# Altium PCB ALL - Copy.PcbDoc (part 2 of 2)
Units mm, origin at the board's own origin, x right, y up, seen from the top; angles counter-clockwise.
Board outline 128.4 x 123.32 mm, 2 copper layers (Top Layer, Bottom Layer); 140 components, 118 nets, 647 pads, 124 vias.
Unrouted connection lines stored in the file: 23.
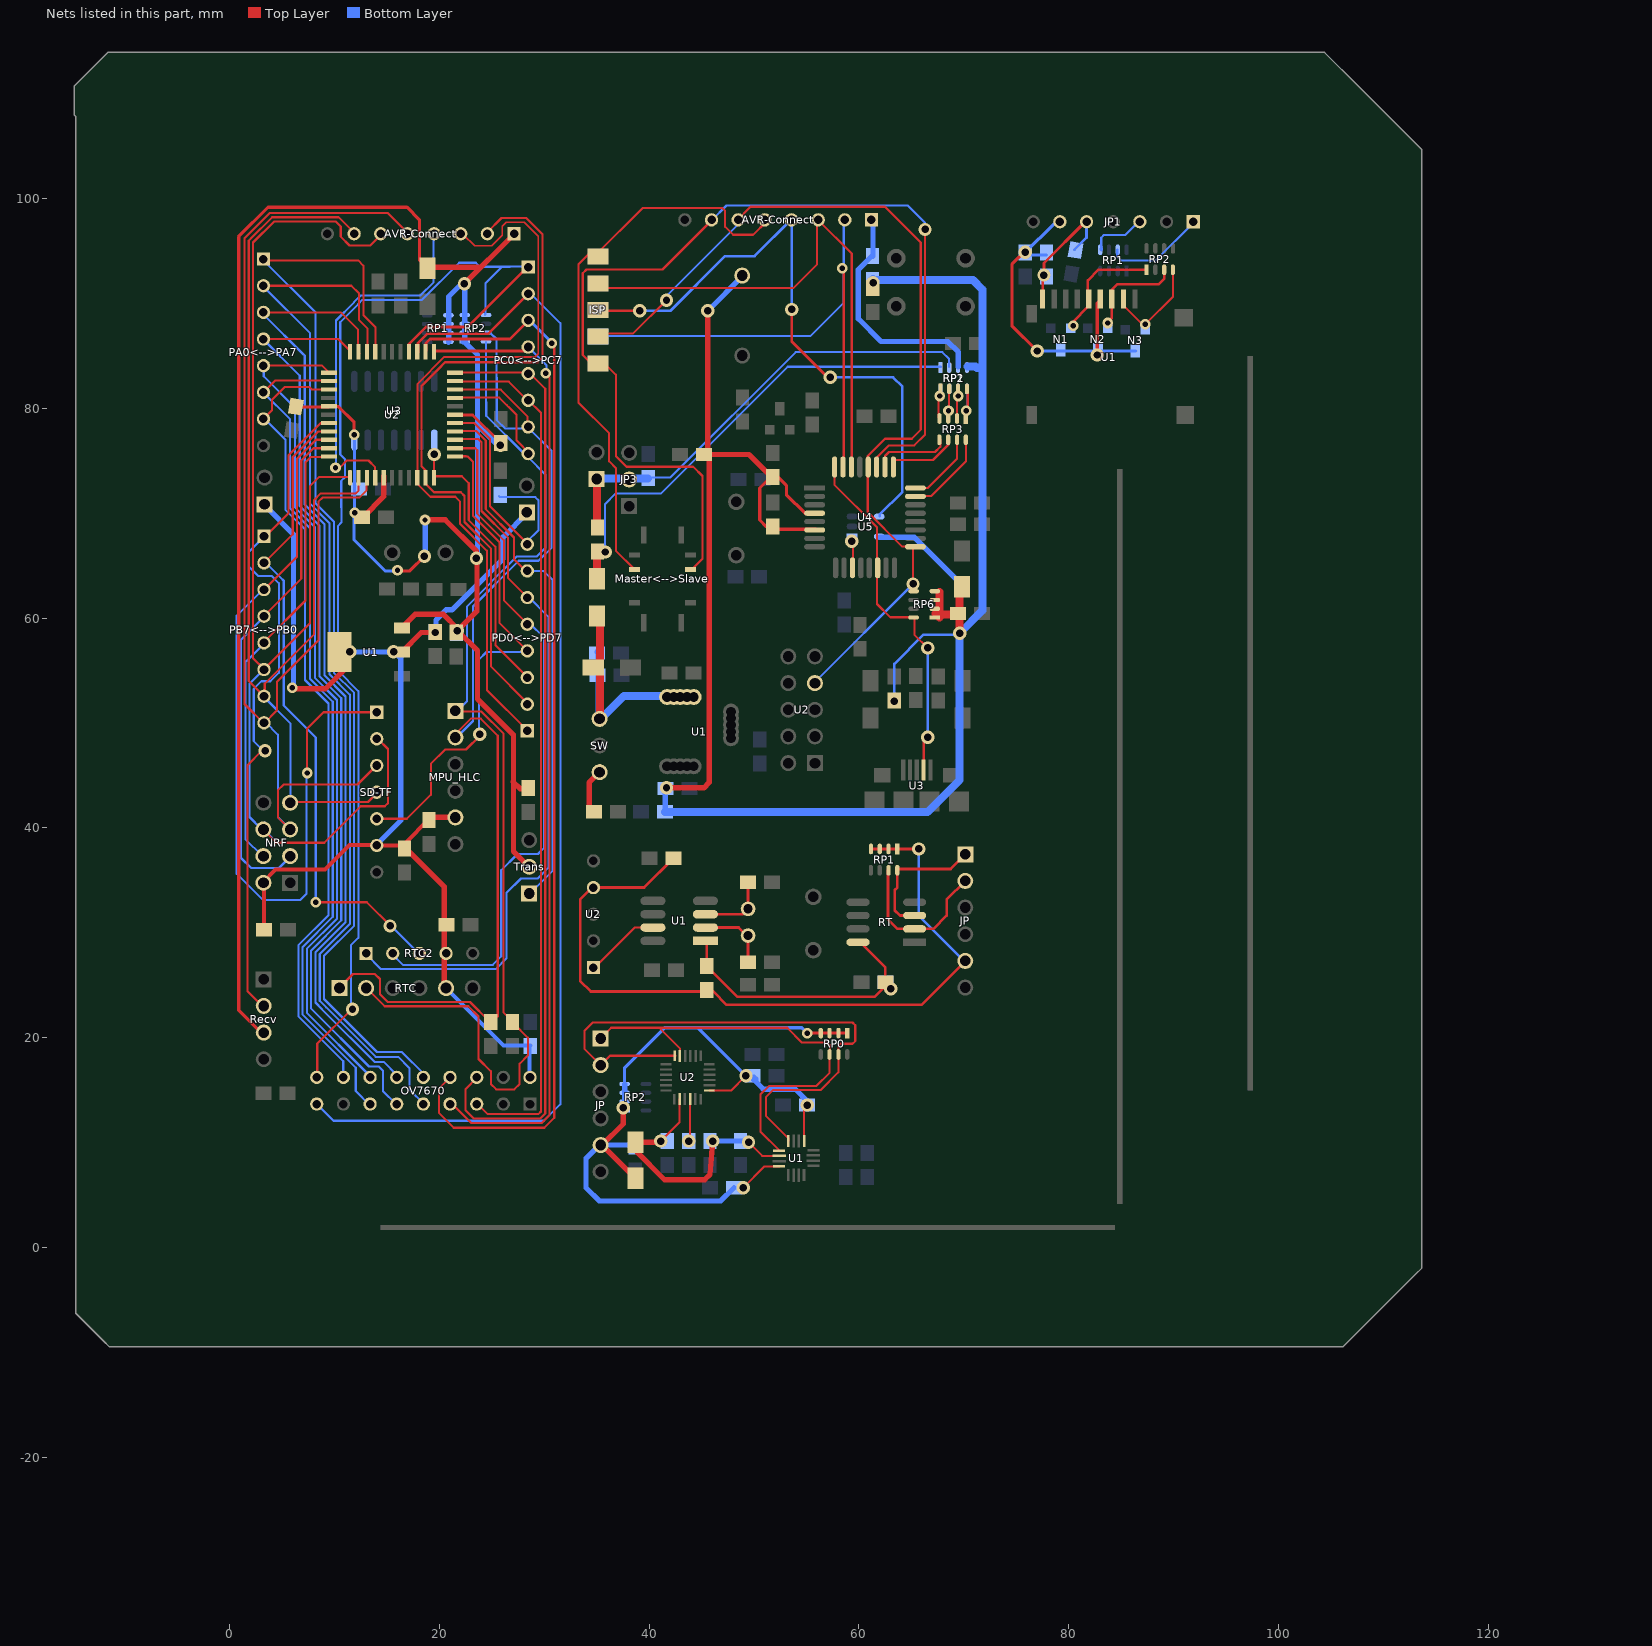
[diagram p2: the nets of this part, all layers, seen from the top]

## Via types
v1: diameter 1.27, hole 0.711, Top Layer to Bottom Layer, 84 vias
v2: diameter 1.016, hole 0.508, Top Layer to Bottom Layer, 35 vias
v3: diameter 1.143, hole 1.143, Top Layer to Bottom Layer, 2 vias
v4: diameter 1.016, hole 1.016, Top Layer to Bottom Layer, 2 vias
v5: diameter 1.016, hole 0.508, Top Layer to Bottom Layer, tented top, 1 vias

## Nets (pads, with @x,y where several pads share a name; then routed paths per layer and width w, separated by ;. In a path a pad name is that pad's centre, name@x,y a point inside that pad or via, vN(x,y) a via of type N, cw(c..) or ccw(c..) an arc to the next point about the centre after c; other vN are vias at no path point) (continued)
PA1: OV7670.16 PA0<-->PA7.7 U2.36 | length 76.3
  Top Layer w0.203: PA0<-->PA7.7@3.251,78.994 4.064,79.807 4.064,80.797 5.283,82.017 7.62,82.017 7.849,81.788 U2.36@9.474,81.788
  Bottom Layer w0.203: PA0<-->PA7.7@3.353,78.943 3.404,78.943 5.334,77.013 5.334,70.326 7.214,68.446 7.214,54.092 9.449,51.857 9.449,31.693 6.579,28.823 6.579,22.041 10.855,17.764 10.855,16.291 OV7670.16@10.846,16.281
PA2: OV7670.13 PA0<-->PA7.6 U2.35 | length 81.1
  Top Layer w0.203: PA0<-->PA7.6@3.251,81.509 4.394,82.652 U2.35@9.347,82.652
  Bottom Layer w0.203: PA0<-->PA7.6@3.302,81.509 3.302,81.432 5.791,78.943 5.791,70.444 7.696,68.539 7.696,54.184 9.855,52.025 9.855,31.525 6.985,28.655 6.985,22.209 12.049,17.145 12.049,14.926 OV7670.13@13.437,13.538
PA3: OV7670.14 PA0<-->PA7.5 U2.34 | length 80.7
  Top Layer w0.203: PA0<-->PA7.5@3.378,84.049 8.839,84.049 U2.34@9.601,83.287
  Bottom Layer w0.203: PA0<-->PA7.5@3.277,84.049 3.277,83.033 6.248,80.061 6.248,70.561 8.179,68.631 8.179,54.276 10.262,52.194 10.262,31.357 7.391,28.486 7.391,22.377 OV7670.14@13.36,16.408
PA4: OV7670.11 PA0<-->PA7.4 U2.33 | length 89.7
  Top Layer w0.203: PA0<-->PA7.4@3.378,86.589 10.363,86.589 U2.33@11.506,85.446
  Bottom Layer w0.203: PA0<-->PA7.4@3.2,86.589 6.706,83.083 6.706,70.679 7.539,69.845 ; 7.544,69.85 8.585,68.809 8.585,54.445 10.668,52.362 10.668,45.796 ; 10.668,45.771 10.668,31.188 7.798,28.318 7.798,22.784 13.31,17.272 14.249,17.272 14.63,16.891 14.63,14.935 OV7670.11@15.9,13.665
PA5: OV7670.12 PA0<-->PA7.3 U2.32 | length 92.9
  Top Layer w0.203: PA0<-->PA7.3@3.251,89.129 10.617,89.129 12.268,87.478 12.268,85.319 U2.32@12.395,85.192
  Bottom Layer w0.203: PA0<-->PA7.3@3.327,89.154 3.327,88.849 7.061,85.115 7.087,85.115 7.188,85.014 7.188,70.815 9.068,68.936 9.068,54.537 11.074,52.53 11.074,31.02 8.204,28.15 8.204,23.362 8.814,22.752 8.814,22.733 11.532,20.015 11.541,20.015 13.86,17.696 ; 13.868,17.704 14.707,17.704 OV7670.12@15.977,16.434
PA6: OV7670.9 PA0<-->PA7.2 U2.31 | length 103
  Top Layer w0.203: PA0<-->PA7.2@3.378,91.669 11.633,91.669 12.37,90.932 12.37,88.392 13.157,87.605 U2.31@13.157,85.573
  Bottom Layer w0.203: PA0<-->PA7.2@3.251,91.694 3.251,91.567 7.696,87.122 7.696,70.882 9.55,69.028 9.55,54.629 11.481,52.699 11.481,30.852 8.611,27.981 8.611,23.53 9.22,22.92 9.22,22.911 13.945,18.186 16.088,18.186 17.154,17.12 17.154,15.078 OV7670.9@18.567,13.665
PA7: OV7670.10 PA0<-->PA7.1 U2.30 | length 106.1
  Top Layer w0.203: PA0<-->PA7.1@3.251,94.209 3.378,94.082 12.268,94.082 12.776,93.574 12.776,88.875 13.919,87.732 U2.30@13.919,85.446
  Bottom Layer w0.203: PA0<-->PA7.1@3.277,94.183 3.277,94.056 8.204,89.129 8.204,70.949 9.957,69.196 9.957,54.797 11.887,52.867 11.887,46.558 ; 9.55,69.602 9.55,69.621 ; 11.887,46.542 11.887,30.683 9.017,27.813 9.017,23.698 14.072,18.644 16.434,18.644 OV7670.10@18.517,16.561 ; 12.573,20.142 12.573,20.168
PB0: PB7<-->PB0.1 Recv.2 U2.40 | length 64.9
  Top Layer w0.203: Recv.2@2.997,23.063 Recv.2@3.175,23.063 ; Recv.2@3.175,23.139 Recv.2@3.2,23.139 ; Recv.2@3.277,22.885 1.727,24.435 1.727,45.974 3.15,47.396 v1@3.378,47.396 ; PB7<-->PB0.1@3.429,67.767 5.639,69.977 5.639,75.514 8.712,78.588 U2.40@9.474,78.588
  Bottom Layer w0.203: v1@3.327,47.269 2.324,48.273 2.324,53.251 3.048,53.975 3.912,53.975 4.724,54.788 4.724,63.322 4.039,64.008 2.769,64.008 1.88,64.897 1.88,66.319 PB7<-->PB0.1@3.327,67.767
  other v1: 3.404,47.346
PB1: PB7<-->PB0.2 RTC2.3 U2.41 | length 62.1
  Top Layer w0.203: PB7<-->PB0.2@3.327,65.253 6.045,67.97 6.045,75.346 8.474,77.775 U2.41@9.423,77.775 ; v2(8.23,32.918) 13.106,32.918 v1@15.469,30.556 ; U2.41@9.423,77.826 U2.41@9.474,77.826
  Bottom Layer w0.203: PB7<-->PB0.2@3.302,65.227 3.505,65.227 5.08,63.652 5.105,63.652 5.182,63.576 5.182,51.664 8.23,48.616 v2@8.23,32.969 ; v1@15.367,30.709 RTC2.3@18.072,28.003
  other v1: 15.316,30.658
PB2: PB7<-->PB0.3 SD-TF.1 U2.42 | length 76.9
  Top Layer w0.203: PB7<-->PB0.3@3.302,62.687 6.452,65.837 6.452,75.178 8.261,76.987 U2.42@9.449,76.987 ; v2(7.417,45.237) 7.417,49.479 8.966,51.029 14.072,51.029 SD-TF.1@14.148,51.105 ; U2.42@9.449,76.937 U2.42@9.474,76.937
  Bottom Layer w0.203: 0.813,60.325 0.813,60.35 ; PB7<-->PB0.3@3.277,62.789 0.711,60.223 0.711,35.636 3.226,33.122 6.731,33.122 7.366,33.757 v2@7.366,45.263
PB3: NRF.3 PB7<-->PB0.4 U2.43 | length 57.5
  Top Layer w0.203: PB7<-->PB0.4@3.327,60.223 6.858,63.754 6.858,75.009 8.023,76.175 U2.43@9.474,76.175
  Bottom Layer w0.203: 1.118,54.093 1.118,55.972 ; 1.219,58.039 PB7<-->PB0.4@3.404,60.223 ; 2.642,36.195 4.699,36.195 NRF.3@5.817,37.313 ; PB7<-->PB0.4@3.277,60.173 3.277,60.122 1.194,58.039 1.194,58.014 1.118,57.937 1.118,37.135 2.057,36.195 4.801,36.195 5.842,37.236 NRF.3@5.842,37.262
PB4: NRF.4 PB7<-->PB0.5 U2.44 | length 43
  Top Layer w0.203: PB7<-->PB0.5@3.327,57.734 7.264,61.671 7.264,74.841 7.785,75.362 U2.44@9.5,75.362 ; U2.44@9.474,75.362 U2.44@9.474,75.413
  Bottom Layer w0.178: 1.524,54.762 1.524,38.938 NRF.4@3.124,37.338
  Bottom Layer w0.203: 1.524,54.762 1.524,55.804 1.676,55.956 1.702,55.956 3.226,57.48 PB7<-->PB0.5@3.226,57.582 ; PB7<-->PB0.5@3.264,57.544 PB7<-->PB0.5@3.327,57.607
PB5: AVR-Connect.6@14.427,96.622 NRF.6 PB7<-->PB0.6 SD-TF.2 U2.1@11.506,73.381 | length 118.3
  Top Layer w0.203: NRF.6@3.277,39.776 4.47,38.583 9.042,38.583 12.522,42.062 14.808,42.062 15.113,42.367 15.113,47.523 SD-TF.2@14.148,48.489 ; PB7<-->PB0.6@3.302,55.143 2.261,56.185 2.261,95.783 4.267,97.79 10.135,97.79 10.617,97.307 10.617,96.342 11.455,95.504 13.437,95.504 14.402,96.469 AVR-Connect.6@14.402,96.647 ; PB7<-->PB0.6@3.353,55.169 7.671,59.487 7.671,72.568 8.56,73.457 U2.1@11.506,73.457
  Bottom Layer w0.203: NRF.6@3.023,39.929 1.918,41.034 1.918,53.734 3.226,55.042 PB7<-->PB0.6@3.226,55.093 ; NRF.6@3.302,39.827 4.394,38.735 ; NRF.6@3.378,39.827 NRF.6@3.378,40.488
PB6: AVR-Connect.7@11.887,96.622 NRF.7 PB7<-->PB0.7 SD-TF.4 U2.2@12.306,73.381 | length 102.2
  Top Layer w0.203: 2.007,96.104 1.854,95.952 1.854,54 PB7<-->PB0.7@3.302,52.553 ; 2.007,96.114 4.089,98.196 10.414,98.196 11.938,96.672 AVR-Connect.7@11.938,96.647 ; PB7<-->PB0.7@3.302,52.527 3.378,52.603 3.378,53.746 8.077,58.445 8.077,71.247 8.712,71.882 12.065,71.882 12.319,72.136 U2.2@12.319,73.457 ; NRF.7@5.842,42.469 13.208,42.469 SD-TF.4@14.122,43.383
  Bottom Layer w0.203: PB7<-->PB0.7@3.2,52.578 5.842,49.936 NRF.7@5.842,42.469
PB7: AVR-Connect.5@16.967,96.622 NRF.5 PB7<-->PB0.8 SD-TF.3 U2.3@13.106,73.381 | length 120.4
  Top Layer w0.203: PB7<-->PB0.8@3.277,49.987 1.448,51.816 1.448,96.19 3.861,98.603 15.088,98.603 17.018,96.672 AVR-Connect.5@17.018,96.647 ; PB7<-->PB0.8@3.327,49.987 4.547,51.206 4.547,53.924 8.484,57.861 8.484,71.079 8.881,71.476 12.395,71.476 13.081,72.161 U2.3@13.081,73.431 ; NRF.5@5.74,39.903 4.623,41.021 4.623,43.586 5.182,44.145 12.217,44.145 13.97,45.898 SD-TF.3@14.122,45.898 ; U2.3@13.106,73.381 U2.3@13.106,73.482
  Bottom Layer w0.203: PB7<-->PB0.8@3.454,50.063 4.623,48.895 4.623,41.046 5.74,39.929 NRF.5@5.74,39.827 ; NRF.5@5.867,39.853 NRF.5@5.893,39.827 ; SD-TF.3@13.487,45.898 SD-TF.3@14.072,45.898
PC0: MPU_HLC.1 PC0<-->PC7.8 R5.2@26.975,21.488 RP2.8@24.46,86.36 RTC.2 U2.19@21.506,80.981 | length 114.7
  Top Layer w0.203: RTC.2@13.106,24.714 14.808,23.012 22.768,23.012 23.749,22.031 23.749,17.983 24.917,16.815 24.917,15.596 25.425,15.088 27.153,15.088 27.661,15.596 27.661,17.526 28.448,18.313 28.448,20.015 R5.2@27.102,21.361 ; U2.19@21.412,81.001 25.73,81.001 27.381,79.35 27.381,76.911 PC0<-->PC7.8@28.626,75.667 ; MPU_HLC.1@21.717,51.003 21.793,51.079 24.028,51.079 26.137,48.971 26.137,22.403 R5.2@27.076,21.463 ; 26.416,80.289 26.441,80.289
  Bottom Layer w0.203: RTC.2@13.081,24.613 RTC.2@13.081,24.663 ; MPU_HLC.1@21.539,51.206 MPU_HLC.1@21.539,51.41 ; MPU_HLC.1@21.666,51.105 22.657,52.095 22.657,61.112 24.968,63.424 24.968,63.449 27.381,65.862 29.286,65.862 30.124,66.7 30.124,73.66 28.423,75.362 PC0<-->PC7.8@28.423,75.413 ; 24.46,80.594 RP2.8@24.46,86.284 ; 24.486,80.594 24.486,79.273 PC0<-->PC7.8@28.169,75.59
PC1: MPU_HLC.2 PC0<-->PC7.7 R4.1@24.917,21.514 RP2.7@24.46,87.198 RTC.1 U2.20@21.506,81.781 | length 107.6
  Top Layer w0.203: RTC.1@10.439,24.74 11.786,26.086 13.868,26.086 14.351,25.603 14.351,24.155 15.088,23.419 22.936,23.419 24.765,21.59 R4.1@24.917,21.59 ; U2.20@21.412,81.763 25.857,81.763 28.397,79.223 28.397,78.334 PC0<-->PC7.7@28.524,78.207 ; MPU_HLC.2@21.438,48.844 23.012,50.419 23.952,50.419 25.578,48.793 25.578,22.047 R4.1@25.07,21.539
  Bottom Layer w0.203: MPU_HLC.2@21.514,48.666 MPU_HLC.2@21.539,48.666 ; MPU_HLC.2@21.539,48.616 21.641,48.616 23.216,50.19 23.216,61.096 27.575,65.456 29.464,65.456 30.709,66.7 30.709,75.921 PC0<-->PC7.7@28.397,78.232 ; RP2.7@24.46,87.198 24.841,87.198 25.451,86.589 25.451,82.931 ; 25.476,82.931 25.476,78.858 26.264,78.07 28.305,78.07 PC0<-->PC7.7@28.423,77.953
PC2: OV7670.5 PC0<-->PC7.6 U2.21@21.506,82.581 | length 82.5
  Top Layer w0.203: U2.21@21.539,82.525 26.619,82.525 PC0<-->PC7.6@28.397,80.747 ; OV7670.5@23.597,13.665 23.673,13.665 24.613,12.725 29.439,12.725 29.693,12.979 29.693,79.553 PC0<-->PC7.6@28.448,80.797
PC3: OV7670.6 PC0<-->PC7.5 U2.22@21.506,83.381 | length 89.9
  Top Layer w0.203: U2.22@21.539,83.414 PC0<-->PC7.5@28.524,83.414 ; OV7670.6@23.571,16.231 23.571,16.18 22.504,15.113 22.504,13.081 23.266,12.319 29.413,12.319 ; PC0<-->PC7.5@28.575,83.388 30.099,81.864 30.099,12.792 29.616,12.31 29.413,12.31
PC4: OV7670.7 PC0<-->PC7.4 U2.23@19.506,85.381 | length 93.3
  Top Layer w0.203: OV7670.7@21.082,13.64 21.285,13.64 23.038,11.887 28.499,11.887 29.769,11.887 30.505,12.624 30.505,82.931 v2@30.15,83.287
  Top Layer w0.254: U2.23@19.634,85.446 28.016,85.446 PC0<-->PC7.4@28.397,85.827
  Bottom Layer w0.203: PC0<-->PC7.4@28.499,85.827 30.226,84.099 v2@30.226,83.414
  other v2: 30.15,83.337
PC5: OV7670.8 PC0<-->PC7.3 U2.24@18.706,85.381 | length 104.5
  Top Layer w0.203: OV7670.8@21.006,16.18 19.964,15.138 19.964,12.852 21.387,11.43 30.023,11.43 30.963,12.37 30.963,85.954 v2@30.658,86.258 ; OV7670.8@21.057,16.078 OV7670.8@21.057,16.256
  Top Layer w0.254: U2.24@18.745,85.446 18.745,86.208 19.126,86.589 26.746,86.589 PC0<-->PC7.3@28.524,88.367
  Bottom Layer w0.254: PC0<-->PC7.3@28.524,88.367 28.626,88.367 v2@30.759,86.233
  other v2: 30.709,86.182
PC6: OV7670.17 PC0<-->PC7.2 U2.25 | length 116.6
  Top Layer w0.254: OV7670.17@8.382,13.513 OV7670.17@8.382,13.64 ; U2.25@17.983,85.319 17.983,86.208 18.872,87.097 24.714,87.097 PC0<-->PC7.2@28.524,90.907
  Bottom Layer w0.203: OV7670.17@8.407,13.614 9.931,12.09 29.972,12.09 31.547,13.665 31.547,88.087 PC0<-->PC7.2@28.727,90.907
  Bottom Layer w0.254: PC0<-->PC7.2@28.473,90.907 PC0<-->PC7.2@28.727,90.907
PC7: OV7670.18 PC0<-->PC7.1 RP2.5@24.46,88.875 U2.26 | length 116
  Top Layer w0.203: OV7670.18@8.382,16.129 8.382,19.456 v1@11.659,22.733
  Top Layer w0.254: U2.26@17.094,85.446 17.094,86.081 18.745,87.732 22.682,87.732 PC0<-->PC7.1@28.397,93.447
  Bottom Layer w0.203: 10.668,70.561 10.668,73.066 11.024,73.422 11.024,75.133 10.566,75.59 10.566,88.189 12.268,89.891 12.268,89.916 12.675,90.322 18.364,90.322 21.895,93.853 23.495,93.853 23.876,93.472 26.746,93.472 ; 10.693,70.561 10.693,69.113 10.363,68.783 10.363,54.966 12.294,53.035 12.294,29.54 11.608,28.854 v1@11.608,22.479 ; RP2.5@24.359,88.9 RP2.5@24.359,89.002 ; RP2.5@24.409,88.925 24.409,91.897 25.984,93.472 ; 26.746,93.497 28.448,93.497 PC0<-->PC7.1@28.473,93.472
  other v1: 11.735,22.708
PD0: AVR-Connect.3@22.047,96.622 PD0<-->PD7.1 U2.9@17.906,73.381 | length 73.6
  Top Layer w0.178: U2.9@17.882,73.431 17.932,73.482 17.932,82.321 20.498,84.887 29.159,84.887 29.439,85.166 29.439,96.368 28.092,97.714 26.391,97.714 26.01,97.333 26.01,96.469 25.019,95.479 23.368,95.479 22.301,96.545 AVR-Connect.3@22.022,96.545 ; 27.963,84.887 28.931,84.887
  Top Layer w0.203: U2.9@17.907,73.482 17.907,72.796 19.152,71.552 21.539,71.552 21.996,71.095 21.996,68.961 24.536,66.421 24.536,53.137 PD0<-->PD7.1@28.423,49.251 ; AVR-Connect.3@22.098,96.672 AVR-Connect.3@22.098,96.723
PD1: AVR-Connect.2@24.587,96.622 PD0<-->PD7.2 U2.10@18.706,73.381 | length 71.2
  Top Layer w0.203: 18.364,82.144 20.218,83.998 ; U2.10@18.694,73.355 18.694,74.067 18.326,74.435 18.326,82.158 20.547,84.379 29.362,84.379 29.845,84.861 29.845,96.571 29.769,96.647 28.296,98.12 25.933,98.12 24.587,96.774 AVR-Connect.2@24.587,96.672 ; U2.10@18.745,73.381 18.745,72.746 19.507,71.984 22.047,71.984 22.403,71.628 22.403,69.155 24.943,66.615 24.943,55.372 PD0<-->PD7.2@28.499,51.816 ; AVR-Connect.2@24.638,96.672 AVR-Connect.2@24.663,96.672 ; 27.838,84.379 29.393,84.379
PD2: PD0<-->PD7.3 U2.11@19.506,73.381 U3.8@19.533,76.962 | length 26.6
  Top Layer w0.203: U2.11@19.507,73.508 22.149,73.508 22.809,72.847 22.809,69.333 25.349,66.793 25.349,57.429 28.448,54.331 PD0<-->PD7.3@28.473,54.331 ; v1@19.507,75.667 19.507,73.635 U2.11@19.558,73.584
  other v1: 19.533,75.59
PD3: PD0<-->PD7.4 SD-TF.5 U2.12@21.506,75.381 | length 50.7
  Top Layer w0.203: SD-TF.5@14.046,40.818 14.097,40.869 16.916,40.869 19.202,43.155 19.202,46.101 20.574,47.473 22.555,47.473 v1@23.927,48.844 ; U2.12@21.412,75.413 22.555,75.413 ; U2.12@21.488,75.387 22.733,75.387 23.216,74.905 23.216,69.739 25.756,67.199 25.756,59.512 PD0<-->PD7.4@28.423,56.845
  Bottom Layer w0.203: v1@23.774,48.971 23.774,56.032 24.511,56.769 28.245,56.769 PD0<-->PD7.4@28.423,56.947 ; PD0<-->PD7.4@28.296,56.845 PD0<-->PD7.4@28.448,56.845 ; PD0<-->PD7.4@28.372,56.769 PD0<-->PD7.4@28.524,56.921
  other v1: 23.851,48.92
PD4: PD0<-->PD7.5 RTC2.2 U2.13@21.506,76.181 | length 67.4
  Top Layer w0.203: RTC2.2@15.621,28.042 RTC2.2@15.723,28.042 ; U2.13@21.539,76.175 23.444,76.175 23.622,75.997 23.622,69.952 26.162,67.412 26.162,61.697 28.448,59.411 PD0<-->PD7.5@28.473,59.436 ; PD0<-->PD7.5@28.486,59.449 PD0<-->PD7.5@28.524,59.411
  Bottom Layer w0.203: RTC2.2@15.494,27.991 16.535,26.949 25.095,26.949 25.908,27.762 25.908,35.966 27.407,37.465 27.534,37.465 27.584,37.516 29.413,37.516 29.997,38.1 29.997,58.115 28.651,59.461 PD0<-->PD7.5@28.448,59.461
PD5: PD0<-->PD7.6 RTC2.1 U2.14@21.506,76.981 | length 71.7
  Top Layer w0.203: U2.14@21.412,77.064 23.708,77.064 24.028,76.743 24.028,70.206 26.568,67.666 26.568,63.805 PD0<-->PD7.6@28.448,61.925
  Bottom Layer w0.203: RTC2.1@13.03,27.965 14.453,26.543 25.375,26.543 26.416,27.584 26.416,33.807 27.788,35.179 29.388,35.179 30.404,36.195 30.404,60.122 28.524,62.001 PD0<-->PD7.6@28.423,62.001
PD6: PD0<-->PD7.7 Trans.1 U2.15@21.506,77.781 | length 51.2
  Top Layer w0.203: U2.15@21.412,77.826 23.52,77.826 24.435,76.911 24.435,70.374 27.127,67.682 27.127,65.608 PD0<-->PD7.7@28.346,64.389 ; Trans.1@28.6,33.807 Trans.1@28.651,33.807
  Bottom Layer w0.203: PD0<-->PD7.7@28.423,64.465 29.972,64.465 30.81,63.627 30.81,35.916 Trans.1@28.575,33.68
PD7: PD0<-->PD7.8 R6.1@25.806,71.73 U2.16@21.506,78.581 | length 24.1
  Top Layer w0.203: U2.16@21.412,78.588 23.342,78.588 24.841,77.088 24.841,70.653 28.397,67.097 PD0<-->PD7.8@28.397,67.056
  Bottom Layer w0.203: R6.1@25.679,71.603 25.756,71.526 29.159,71.526 29.464,71.222 29.464,68.377 28.346,67.259 PD0<-->PD7.8@28.346,67.056
PUSH: C2.1@80.635,95.056 JP1.5 R1.2@77.876,92.558 U1.9@77.495,90.399 | length 12
  Top Layer w0.254: U1.9@77.495,90.399 v1@77.495,92.558 ; v1@77.622,92.812 77.622,93.828 JP1.5@81.559,97.765
  Bottom Layer w0.254: C2.1@80.543,95.098 81.686,96.241 JP1.5@81.686,97.892
  other v1: 77.622,92.685
REGOUT: C13.1@43.764,10.16 U2.10@43.908,14.148 | length 4
  Top Layer w0.203: v1(43.764,10.16) 43.908,10.304 U2.10@43.908,14.148
RESET: U4.11 U5.1 | length 2.2
  Top Layer w0.203: U4.11@59.436,64.897 v1@59.436,67.056
  other v1: 59.309,67.31
RST: AVR-Connect.4@19.507,96.622 U2.4@13.906,73.381 | length 34.4
  Top Layer w0.203: v2@10.465,74.27 11.201,75.006 13.259,75.006 13.894,74.371 U2.4@13.894,73.406
  Bottom Layer w0.203: v2@10.16,74.32 10.16,88.357 11.862,90.059 11.862,90.084 12.506,90.729 18.196,90.729 19.466,91.999 19.466,96.453 AVR-Connect.4@19.583,96.571
  other v2: 10.109,74.32
RXD: AVR-Connect.2@58.649,97.942 ISP.8 U4.31 | length 51.3
  Top Layer w0.203: U4.31@58.547,74.549 v2@58.547,93.345
  Bottom Layer w0.203: ISP.8@35.433,86.868 55.372,86.868 58.547,90.043 58.547,97.917 AVR-Connect.2@58.674,98.044
  other v2: 58.42,93.345
S1: RP1.8@67.767,81.839 RP2.1@67.767,81.839 RP3.4 | length 1.9
  Top Layer w0.178: RP3.4@67.564,79.121 v2@67.564,81.026
  other v2: 67.691,81.153
S2: RP1.7@68.605,81.839 RP2.2@68.605,81.839 RP3.3 | length 4.2
  Top Layer w0.178: v2@68.58,79.756 RP2.2@68.58,81.915
  Bottom Layer w0.178: v2@68.58,79.756 RP1.7@68.58,81.788
  other v2: 68.529,79.756
S3: RP1.6@69.444,81.839 RP2.3@69.444,81.839 RP3.2 | length 1.9
  Top Layer w0.203: RP3.2@69.342,79.248 v2@69.342,81.153
  other v2: 69.444,81.153
S4: RP1.5@70.282,81.839 RP2.4@70.282,81.839 RP3.1 | length 3.9
  Top Layer w0.203: v2@70.358,80.01 RP2.4@70.358,81.915
  Bottom Layer w0.203: v2@70.358,79.883 RP1.5@70.358,81.915
  other v2: 70.231,79.756
SAMP1: RP3.8 U4.23 | length 8.3
  Top Layer w0.203: U4.23@65.405,71.628 66.901,71.628 70.203,74.93 70.203,77.061 RP3.8@70.231,77.089
SAMP2: RP3.7 U4.24 | length 7
  Top Layer w0.203: U4.24@65.378,72.39 66.548,72.39 69.342,75.184 RP3.7@69.342,77.089
SAMP3: RP3.6 U4.25 | length 6.3
  Top Layer w0.203: U4.25@63.246,75.057 67.056,75.057 68.58,76.581 RP3.6@68.58,76.962
SAMP4: RP3.5 U4.26 | length 7.3
  Top Layer w0.203: U4.26@62.484,74.549 62.484,75.438 62.865,75.819 67.243,75.819 67.751,76.327 67.751,77.029 RP3.5@67.691,77.089
SCK: AVR-Connect.6@48.489,97.942 ISP.7 JP1.3 RP1.5@82.982,95.098 RP6.5 U1.7@40.364,30.505 U2.1@34.696,26.695 U2.7@55.804,53.797 U4.17 U4.28 | length 102.6
  Top Layer w0.203: U2.1@34.696,26.568 38.633,30.505 U1.7@40.411,30.505 ; ISP.7@35.306,87.122 38.481,87.122 v1(41.656,90.297) ; v1@41.831,90.418 v1@41.955,90.416 ; AVR-Connect.6@48.387,97.917 49.657,99.187 62.484,99.187 65.888,95.783 65.888,77.953 65.024,77.089 62.484,77.089 60.833,75.438 60.833,70.104 64.135,66.802 65.151,66.802 RP6.5@65.151,62.484
  Bottom Layer w0.203: v1@41.783,90.297 41.783,90.805 AVR-Connect.6@48.641,97.663 ; U2.7@55.753,53.721 55.753,53.848 v1(65.151,63.246) ; RP1.5@83.083,95.225 83.083,96.241 83.337,96.495 85.369,96.495 JP1.3@86.512,97.638
  Bottom Layer w0.305: RP1.5@83.083,95.098 RP1.5@83.083,95.225
SCL: JP.1@35.382,19.939 JP.2@70.129,34.95 RP0.6 RP1.7@62.814,35.966 RT.2 U1.1@52.4,9.246 U2.23@42.934,18.288 | length 58.2
  Top Layer w0.203: JP.1@35.382,19.939 36.398,20.955 53.162,20.955 54.559,19.558 56.972,19.558 57.226,19.304 57.226,18.44 RP0.6@57.201,18.415 57.201,16.662 55.956,15.418 51.435,15.418 50.622,14.605 50.622,11.049 52.4,9.271 U1.1@52.4,9.246 ; 40.97,20.955 42.934,18.991 U2.23@42.934,18.288
  Top Layer w0.254: RP1.7@62.763,35.966 62.763,31.267 63.652,30.378 67.081,30.378 68.351,31.648 68.351,33.172 JP.2@70.129,34.95 ; RT.2@65.049,30.632 RT.2@65.303,30.378
SD_CS: N3.E RP2.4@89.916,93.193 U1.2@85.195,90.399 | length 9.6
  Top Layer w0.203: U1.2@85.242,90.399 85.242,89.764 v2@87.147,87.859 ; v2(87.274,87.986) 89.916,90.627 RP2.4@89.916,93.193
SD_DI: N2.E RP2.3@89.078,93.193 U1.3@84.095,90.399 | length 9.4
  Top Layer w0.254: v2@83.718,88.24 84.095,88.617 U1.3@84.095,90.399 ; U1.3@84.099,90.526 84.099,91.288 84.607,91.796 88.544,91.796 89.078,92.329 RP2.3@89.078,93.193
  other v2: 83.718,88.113
SD_SCK: N1.E@80.162,87.605 RP2.1@87.401,93.193 U1.5@81.895,90.399 | length 10.8
  Top Layer w0.254: v5@80.289,88.113 81.94,89.764 81.94,90.272 81.813,90.399 81.813,92.177 82.829,93.193 RP2.1@87.401,93.193
  other v5: 80.416,87.859
SDA: JP.1@70.129,37.49 JP.2@35.382,17.399 RP0.7 RP1.8@63.652,35.966 RT.3 U1.16 U2.24@42.434,18.288 | length 69.7
  Top Layer w0.203: U2.24@42.494,18.288 36.271,18.288 JP.2@35.382,17.399 33.858,18.923 33.858,20.701 34.62,21.463 59.385,21.463 59.639,21.209 59.639,19.685 59.385,19.431 58.242,19.431 58.039,19.228 58.039,16.713 56.337,15.011 51.791,15.011 51.13,14.351 51.13,12.573 53.269,10.434 U1.16@53.269,10.16
  Top Layer w0.254: RP1.8@63.652,35.966 63.652,34.315 63.398,34.061 63.398,32.156 63.906,31.648 RT.3@65.43,31.648 ; RP1.8@63.652,36.093 68.732,36.093 JP.1@70.129,37.49
  Bottom Layer w0.203: JP.2@35.382,17.399 JP.2@35.509,17.399
SS: JP1.1 RP1.7@84.658,95.098 | length 9.5
  Bottom Layer w0.203: RP1.7@84.607,95.098 84.607,94.463 84.988,94.082 88.29,94.082 JP1.1@91.846,97.638
TMISO: AVR-Connect.7@45.949,97.942 ISP.9 Master<-->Slave.4 U4.27 | length 99.3
  Top Layer w0.203: ISP.9@34.544,84.201 33.68,85.065 33.68,92.862 34.036,93.218 41.275,93.218 45.847,97.79 AVR-Connect.7@45.847,97.917 ; ISP.9@35.179,84.074 ISP.9@35.306,84.074 ; ISP.9@35.687,84.328 36.83,83.185 36.83,75.438 37.846,74.422 44.196,74.422 45.085,73.533 45.085,65.659 Master<-->Slave.4@43.942,64.516 ; AVR-Connect.7@45.974,97.79 AVR-Connect.7@46.101,97.917 ; U4.27@61.722,74.549 61.722,75.311 62.865,76.454 65.278,76.454 66.294,77.47 v1@66.294,96.901
  Bottom Layer w0.203: AVR-Connect.7@45.974,97.917 47.371,99.314 64.643,99.314 66.294,97.663 v1@66.294,97.155
  other v1: 66.294,97.028
TMOSI: AVR-Connect.5@51.029,97.942 ISP.1 Master<-->Slave.1 | length 53.3
  Top Layer w0.203: ISP.1@34.29,94.742 33.274,93.726 33.274,80.518 36.195,77.597 36.195,74.93 36.83,74.295 36.83,66.421 Master<-->Slave.1@38.608,64.643 ; ISP.1@34.925,94.615 39.37,99.06 46.99,99.06 47.244,98.806 47.244,97.282 48.006,96.52 49.911,96.52 AVR-Connect.5@51.181,97.79
TRST: AVR-Connect.4@53.569,97.942 ISP.5 U5.4 | length 59.9
  Top Layer w0.254: ISP.5@35.306,89.281 v1(39.116,89.281) v1@39.243,89.408 ; v1(53.594,89.408) 53.594,86.36 57.023,82.931 v1(57.277,82.931) ; AVR-Connect.4@53.594,97.687 AVR-Connect.4@53.594,97.79 ; AVR-Connect.4@53.594,98.044 AVR-Connect.4@53.721,97.917 ; v1@57.15,82.931 v1@57.15,83.058
  Bottom Layer w0.254: v1@38.989,89.281 42.037,89.281 47.244,94.488 50.038,94.488 AVR-Connect.4@53.594,98.044 ; v1(39.116,89.281) v1@39.116,89.535 ; v1@53.594,89.535 AVR-Connect.4@53.594,97.917 ; v1(57.277,82.931) 63.246,82.931 64.135,82.042 64.135,72.009 61.976,69.85 U5.4@61.976,69.723
TVCC: AVR-Connect.1@61.189,97.942 R7.1 RP1.3@69.444,83.871 | length 22.4
  Bottom Layer w0.508: AVR-Connect.1@61.214,97.917 61.341,97.79 R7.1@61.341,94.488 ; R7.1@61.341,94.615 59.944,93.218 59.944,88.519 62.103,86.36 68.453,86.36 69.469,85.344 RP1.3@69.469,83.947
TXD: AVR-Connect.3@56.109,97.942 ISP.3 U4.30 | length 50.8
  Top Layer w0.203: ISP.3@35.179,91.44 53.721,91.44 56.007,93.726 56.007,97.79 56.134,97.917 59.309,94.742 U4.30@59.309,74.422
USB-ID: RP6.8 U3.4@66.161,45.517 U4.14 U4.32 | length 34.3
  Top Layer w0.203: U4.32@57.658,74.549 57.658,72.704 61.722,68.64 61.722,61.341 62.992,60.071 65.278,60.071 65.278,58.42 v1(66.548,57.15) ; U3.4@66.167,45.466 66.167,48.26 v1(66.548,48.641)
  Bottom Layer w0.203: v1(66.548,48.641) v1(66.548,57.15)
VBUS: F1.1 SW.1 | length 4.1
  Top Layer w0.508: F1.1@34.29,41.656 34.29,44.323 SW.1@35.306,45.339
VCC: AVR-Connect.1@27.127,96.622 BELL.1 C3.1@12.649,69.596 C4.1@25.857,76.683 C4.2@62.509,25.298 C5.1@6.347,80.152 C5.1@62.509,25.298 C8.1 C9.1@21.641,58.598 C11.1@69.444,60.427 C12.1 C13.1@28.473,43.79 C13.1@51.791,68.732 C14.1@12.344,72.288 C14.1@51.791,73.431 C19.1@41.554,43.764 F2.1 L1.1 L3.1 R1.1@45.491,26.822 R2.2@61.316,91.44 R4.2@63.348,52.121 R7.2 Recv.3 RP1.4@70.282,83.871 RP1.5@20.879,88.849 RP1.6@20.879,88.011 RP1.7@20.879,87.173 RP1.8@20.879,86.335 RP2.1@22.428,86.36 RP2.2@22.428,87.198 RP2.3@22.428,88.036 RP2.4@22.428,88.875 RP6.1 RP6.2 RP6.3 RP6.4 RT.8 Trans.2 U1.1@45.364,29.235 U1.3@16.459,59.058 U2.5@14.706,73.381 U2.17@21.506,79.381 U2.38 U3.14 U4.4 U4.6 U5.5 | length 464.9
  Top Layer w0.254: C5.1@6.426,80.239 6.553,80.112 U2.38@9.474,80.112 ; U2.17@21.539,79.35 23.19,79.35 C4.1@25.73,76.81 ; R1.1@45.364,26.822 R1.1@45.491,26.822 48.412,23.901 61.493,23.901 62.763,25.171 62.636,25.171 62.509,25.044 62.509,26.695 RT.8@60.096,29.108 ; R1.1@45.491,26.695 U1.1@45.491,29.235
  Top Layer w0.305: 0.864,96.317 3.683,99.136 16.942,99.136 18.11,97.968 18.11,94.132 L1.1@18.847,93.396 ; 0.889,96.317 0.889,22.631 3.023,20.498 Recv.3@3.277,20.498 ; U2.38@9.373,80.188 9.398,80.162 10.389,80.162 11.887,78.664 v2@11.887,77.495 ; v2@16.078,64.491 17.196,64.491 v1(18.593,65.888) ; C14.1@51.435,73.279 50.546,72.39 50.546,69.342 51.181,68.707 C13.1@51.816,68.707 ; C13.1@51.943,68.453 U4.6@55.88,68.453 ; C14.1@52.07,73.66 53.086,72.644 53.086,71.755 54.864,69.977 U4.4@55.88,69.977
  Top Layer w0.508: C3.1@12.776,69.647 14.707,71.577 U2.5@14.707,73.508 ; U1.3@16.485,59.131 17.704,60.35 20.396,60.35 C8.1@21.768,58.979 ; v2@18.593,69.393 18.618,69.367 20.599,69.367 ; L1.1@19.05,93.421 22.454,93.421 ; 20.574,69.342 23.546,66.37 v1@23.546,65.735 ; C8.1@21.692,58.75 23.597,60.655 v1@23.597,65.583 ; C8.1@21.768,58.776 23.647,56.896 23.647,52.299 27.076,48.87 27.076,44.399 ; v1@22.403,91.872 AVR-Connect.1@27.051,96.52 ; 22.479,93.421 23.952,93.421 ; 27.051,44.399 27.711,43.739 C13.1@28.423,43.739 ; 27.076,44.374 27.076,37.77 Trans.2@28.562,36.284 ; v1(41.656,43.815) 45.212,43.815 45.72,44.323 C12.1@45.72,75.692 ; C12.1@45.212,75.59 49.505,75.59 C14.1@51.816,73.279 ; C12.1@45.593,75.565 v1@45.593,89.154
  Top Layer w0.762: 67.31,60.452 67.437,60.325 C11.1@69.469,60.325 ; RP6.1@67.691,60.071 RP6.4@67.691,62.484 ; L3.1@69.469,63.119 L3.1@69.596,62.992 ; v1(69.596,58.547) L3.1@69.596,62.967
  Bottom Layer w0.254: v1@63.373,52.197 63.373,55.626 66.167,58.42 69.342,58.42 v1@69.469,58.547
  Bottom Layer w0.305: v2@11.887,69.977 11.887,67.437 14.834,64.491 v2@16.027,64.491 ; v2@11.913,69.977 U3.14@11.913,76.962 ; v2@11.938,69.571 v2@11.938,69.952
  Bottom Layer w0.508: v1@18.669,65.888 v2@18.669,69.342 ; RP1.8@20.879,86.284 20.904,86.309 20.904,90.627 22.098,91.821 v1@22.301,91.821 ; RP2.1@22.301,86.335 22.428,86.462 v1@22.428,91.872 ; RP2.1@22.428,86.436 22.428,86.309 23.647,85.09 v1@23.647,65.684 ; v1@22.454,91.923 v1@22.504,91.872 ; RP2.1@22.479,86.385 RP2.1@22.504,86.36 ; 23.647,78.384 25.552,76.479 v1@25.933,76.479 ; F2.1@41.529,41.529 C19.1@41.529,43.815 ; v1(45.593,89.281) BELL.1@48.895,92.583 ; U5.5@61.976,67.691 65.278,67.691 69.596,63.373 v1@69.596,58.674
  Bottom Layer w0.762: F2.1@41.529,41.529 66.548,41.529 69.596,44.577 v1(69.596,58.547) 71.755,60.706 71.755,91.313 70.866,92.202 R7.2@61.29,92.202 ; R7.2@61.214,92.202 R7.2@61.341,92.329 ; R7.2@61.341,92.075 R7.2@61.468,92.202 ; RP1.4@70.358,83.947 71.12,83.947 71.247,83.82
  other v1: 63.017,24.663 63.373,52.07 21.717,58.776 23.546,65.684 25.832,76.479 22.403,91.846 61.341,91.948
  other v2: 16.027,64.541 18.644,69.342 11.963,70.028 11.913,77.47
VCC33: C1.1@75.844,94.844 C10.1@19.634,58.649 C11.1@19.634,58.649 C15.1@19.025,40.767 C16.1@16.688,38.049 C17.1@28.677,19.202 C18.2@20.701,30.785 C19.2@3.302,30.302 JP1.6 JP3.1@28.346,70.079 JP4.1 MPU_HLC.5 N1.C@79.223,85.573 N2.C N3.C NRF.2 OV7670.2 R1.1@77.876,94.844 RTC2.4 RTC.5 SD-TF.6 U1.2@16.459,56.758 U1.4@10.49,56.744 U1.4@82.995,90.399 | length 155.1
  Top Layer w0.305: v1(75.844,94.844) 75.717,94.844 74.574,93.701 74.574,87.859 v1(76.987,85.446) ; v1@82.702,84.938 82.702,90.018 U1.4@83.083,90.399
  Top Layer w0.381: NRF.2@3.2,34.823 4.394,36.017 9.119,36.017 11.455,38.354 13.868,38.354 SD-TF.6@13.919,38.405 ; NRF.2@3.302,34.874 3.302,30.48 C19.2@3.353,30.429 ; SD-TF.6@14.072,38.303 16.561,38.303 C16.1@16.586,38.278 ; C16.1@16.815,38.303 16.815,38.633 C15.1@18.974,40.792
  Top Layer w0.508: v2@6.045,53.264 9.169,53.264 U1.4@11.125,55.22 ; v2@6.045,53.34 v2@6.045,53.543 ; U1.4@10.338,56.261 U1.4@10.592,56.515 ; U1.4@10.439,56.972 U1.4@10.643,56.769 ; U1.4@10.49,56.744 U1.4@10.541,56.693 ; SD-TF.6@13.843,38.303 SD-TF.6@13.894,38.252 ; SD-TF.6@14.046,38.252 SD-TF.6@14.072,38.252 ; U1.2@16.256,56.794 U1.2@16.281,56.769 ; U1.2@16.434,56.769 18.288,58.623 C11.1@19.736,58.623 ; C16.1@16.891,37.998 20.472,34.417 20.472,24.79 RTC.5@20.523,24.74 ; C15.1@18.948,41.021 21.488,41.021 MPU_HLC.5@21.565,40.945
  Bottom Layer w0.305: C1.1@75.717,94.717 78.638,97.638 JP1.6@79.146,97.638 ; C1.1@75.971,94.59 R1.1@77.876,94.59 ; v1(76.987,85.446) N3.C@86.385,85.446 ; JP1.6@79.019,97.384 JP1.6@79.019,97.638
  Bottom Layer w0.381: RTC.5@20.701,24.689 26.111,19.279 C17.1@28.702,19.279 ; C17.1@28.6,19.126 28.6,16.205 OV7670.2@28.727,16.078
  Bottom Layer w0.508: JP4.1@3.378,70.866 3.378,70.714 6.121,67.97 6.121,53.442 v2@6.096,53.416 ; v1@11.278,56.744 11.303,56.769 v1@15.596,56.769 ; SD-TF.6@13.995,38.354 13.995,38.379 16.332,40.716 16.332,56.159 v1@15.646,56.845 ; C10.1@19.685,58.649 19.685,59.817 20.625,60.757 ; 20.676,60.782 21.209,60.782 26.06,65.634 26.06,67.691 JP3.1@28.423,70.053
  other v1: 11.481,56.794 15.646,56.794 19.634,58.623 82.702,85.065
  other v2: 5.994,53.365
VDA33: C15.2@45.796,10.16 C16.1@41.732,10.16 C18.1@48.717,10.16 L2.1 U1.2@52.4,8.746 U2.8@42.908,14.148 | length 26
  Top Layer w0.203: v1(41.097,10.16) 42.908,11.971 U2.8@42.908,14.148 ; v1(49.479,10.033) 50.767,8.746 U1.2@52.4,8.746
  Top Layer w0.508: v1(41.097,10.16) 40.97,10.033 L2.1@38.684,10.033 38.684,9.271 41.478,6.477 45.288,6.477 45.796,6.985 v1(46.05,10.16)
  Bottom Layer w0.508: v1(46.05,10.16) C18.1@48.971,10.16
VDD: C2.2@42.316,37.109 JP.5@70.129,27.33 R1.2@45.491,24.536 RP1.1@63.652,37.998 RP1.2@62.814,37.998 RP1.3@61.976,37.998 RP1.4@61.138,37.998 U2.4@34.696,34.315 | length 74.5
  Top Layer w0.254: U2.4@34.569,34.315 33.426,33.172 33.426,25.425 34.442,24.409 46.126,24.409 47.396,23.139 65.938,23.139 JP.5@70.129,27.33 ; U2.4@34.696,34.315 39.522,34.315 C2.2@42.316,37.109 ; RP1.4@61.138,37.998 v1(65.684,37.998)
  Bottom Layer w0.254: v1(65.684,37.998) 65.684,31.648 JP.5@70.002,27.33
VDD33: C3.2@55.067,13.589 C4.2@49.86,16.383 C5.1@48.082,5.715 C6.1@38.684,9.652 JP.5@35.382,9.779 L2.2 RP0.1 RP0.2 RP0.3 RP0.4 RP2.1@37.668,13.081 RP2.2@37.668,13.919 RP2.3@37.668,14.757 RP2.4@37.668,15.596 U1.4@52.4,7.746 U1.13 U2.13@45.745,14.975 | length 84.3
  Top Layer w0.203: U2.13@45.745,14.975 47.817,14.975 v1(49.225,16.383) ; v1(48.971,5.715) 51.002,7.746 U1.4@52.4,7.746 ; U1.13@54.769,10.16 54.769,13.29 v1@55.194,13.716
  Top Layer w0.305: v2(55.067,20.447) RP0.1@58.877,20.447
  Top Layer w0.508: JP.5@35.382,9.779 JP.5@35.509,9.779 ; v1(37.541,13.335) 37.541,11.811 JP.5@35.509,9.779 ; L2.2@38.684,6.604 JP.5@35.509,9.779
  Bottom Layer w0.305: RP2.4@37.668,15.596 37.668,17.145 41.478,20.955 54.559,20.955 v2(55.067,20.447) ; 44.653,20.955 v1(49.225,16.383)
  Bottom Layer w0.381: C4.2@50.241,16.002 C4.2@50.241,16.129
  Bottom Layer w0.508: RP2.1@37.668,13.081 RP2.4@37.668,15.596 ; C6.1@38.684,9.652 38.557,9.779 35.255,9.779 33.985,8.509 33.985,5.715 35.255,4.445 46.812,4.445 C5.1@48.082,5.715 ; C4.2@49.987,16.256 49.987,16.002 50.876,15.113 53.924,15.113 C3.2@55.194,13.843
  other v1: 55.067,13.589
VP: C18.1@39.903,73.33 JP3.2@38.1,73.203 JPP.1 R11.1 RP1.2@68.605,83.871 | length 44.5
  Top Layer w0.762: R11.1@35.052,68.58 JPP.1@35.052,73.406
  Bottom Layer w0.203: C18.1@39.878,73.406 42.037,73.406 53.975,85.344 67.945,85.344 68.58,84.709 RP1.2@68.58,83.947
  Bottom Layer w0.762: JPP.1@35.052,73.279 C18.1@39.878,73.279 ; JP3.2@38.1,73.279 JP3.2@38.227,73.152
VPOWER: C1.2@35.077,54.534 CP.1 D3.A R1.1@35.027,56.667 SW.3 U1.1@41.707,52.476 U1.1@42.342,52.476 U1.1@42.977,52.476 U1.1@43.612,52.476 U1.1@44.247,52.476 | length 26.2
  Top Layer w0.762: D3.A@35.179,60.198 35.306,60.071 SW.3@35.306,50.419
  Bottom Layer w0.762: R1.1@35.179,56.769 35.281,56.667 SW.3@35.281,50.394 ; SW.3@35.306,50.292 37.592,52.578 U1.1@44.323,52.578
VPR: D3.K R11.2 RP1.1@67.767,83.871 | length 44.3
  Top Layer w0.762: D3.K@35.052,63.754 R11.2@35.052,66.04
  Bottom Layer w0.203: v1(35.814,66.294) 35.814,70.866 36.83,71.882 41.148,71.882 53.213,83.947 RP1.1@67.818,83.947
X1: OSC1.2@49.428,29.743 R2.1@49.428,27.203 U1.2@45.364,30.505 | length 6.7
  Top Layer w0.254: U1.2@45.618,30.505 48.539,30.505 OSC1.2@49.301,29.743 ; R2.1@49.428,27.076 OSC1.2@49.428,29.743
X2: OSC1.1@49.428,32.283 R3.1@49.428,34.823 U1.3@45.364,31.775 | length 7.2
  Top Layer w0.254: U1.3@45.364,31.775 48.92,31.775 OSC1.1@49.555,32.41 ; R3.1@49.301,34.95 R3.1@49.428,34.823 OSC1.1@49.428,32.283
pads on no net: ISP.2 ISP.6 Master<-->Slave.0 RP1.1@85.496,93.066 RP1.8@85.496,95.098 RP2.2@88.24,93.193 RP2.7@39.7,13.919 U1.1@86.295,90.399 U1.8@78.595,90.399 U2.3@55.804,48.717 U3.7@69.511,42.517 U3.8@66.711,42.517 U3.9@64.261,42.517 U3.10@61.461,42.517 U3.11@62.211,45.017
copper on no net:
  other v3: 78.892,79.554 86.943,79.554
  other v4: 41.275,62.332 41.275,65.126

## Keep-outs
Keep-Out Layer:
  lines w0.1: -0.025,-0.025 99.975,-0.025 99.975,99.975 -0.025,99.975 -0.025,-0.025
  lines w0.102: 85.369,4.115 85.369,13.233 ; 85.377,4.115 86.377,4.115 ; 85.377,13.233 86.377,13.233 ; 85.496,65.1 85.496,74.219 ; 85.504,65.1 86.504,65.1 ; 85.504,74.219 86.504,74.219 ; 86.385,4.115 86.385,13.233 ; 86.512,65.1 86.512,74.219 ; 95.555,14.808 95.555,23.927 ; 95.563,14.808 96.563,14.808 ; 95.563,23.927 96.563,23.927 ; 95.733,75.692 95.733,84.811 ; 95.74,75.692 96.52,75.692 96.52,84.811 95.74,84.811 ; 96.571,14.808 96.571,23.927

## Silkscreen, mask and mechanical layers (free items; w line width, h text height)
Top Overlay:
  lines w0.152: 0.305,11.074 32.055,11.074 ; 31.979,99.695 32.029,11.074 ; 32.893,40.005 32.893,99.822 ; 32.894,40.003 73.025,39.885 73.025,99.695 ; 32.918,22.377 72.288,22.377 72.288,39.141 32.918,39.141 32.918,22.377 ; 32.969,3.81 62.179,3.81 62.179,21.844 32.969,21.844 32.969,3.81
  lines w0.254: 73.939,99.797 73.939,76.937 93.624,76.937 93.624,99.797
  text "GND" at 41.656,96.647 h1.02 r90
  text "RST" at 55.118,96.52 h1.02 r180
  text "SCK," at 48.133,96.393 h1.02 r180
  text "MOSI" at 52.197,96.393 h1.02 r180
  text "MISO" at 44.45,96.266 h1.02 r180
  text "TXD," at 58.801,96.266 h1.02 r180
  text "RXD," at 62.357,96.266 h1.02 r180
  text "VCC33" at 77.749,95.86 h1.02 r310
  text "PUSH" at 79.781,95.86 h1.02 r310
  text "SS" at 91.973,95.86 h1.02 r270
  text "MISO" at 82.067,95.733 h1.02 r310
  text "MOSI" at 90.576,95.733 h1.02 r270
  text "GND" at 76.352,95.606 h1.02 r310
  text "VCC5" at 63.881,95.504 h1.02 r90
  text "SCK" at 84.48,95.479 h1.02 r310
  text "JLCJLCJLCJLC" at 91.491,0.94 h1.02 r90
Bottom Overlay:
  text "SDA" at 66.7,38.633 h1.02 r160
  text "GND" at 39.014,36.347 h1.02
  text "SCL" at 66.065,35.966 h1.02 r160
  text "INTB" at 65.303,34.061 h1.02 r160
  text "2-5.5V" at 41.808,33.807 h1.02
  text "IO" at 37.871,31.267 h1.02
  text "INTA" at 65.303,31.267 h1.02 r160
  text "1.8-5.5V" at 61.747,30.124 h1.02 r160
  text "SCK" at 39.014,28.854 h1.02
  text "CE" at 37.871,26.314 h1.02
  text "GND" at 66.192,25.933 h1.02 r160
  text "SDC" at 36.779,18.034 h1.02
  text "SDA" at 36.652,15.621 h1.02
  text "DRDY" at 36.906,12.954 h1.02
  text "I6050" at 38.049,10.668 h1.02
  text "3.3V" at 37.414,8.001 h1.02
  text "GND" at 33.985,6.096 h1.02 r180

## Text inside footprints (layer, text, board x,y; h text height)
NRF: Top Overlay "1" at 5.182,33.731 h1.27 r270; Top Overlay "2" at 2.718,33.985 h1.27 r270
OV7670: Top Overlay "2" at 30.836,17.272 h1.02 r180; Top Overlay "1" at 30.48,14.072 h1.02 r180
U2: Top Overlay "1" at 55.22,42.469 h1.27 r270; Top Overlay "2" at 52.68,42.926 h1.27 r270
U4: Top Overlay "1" at 55.27,72.898 h1.02